# Altium PCB flatsat_2_PCB.PcbDoc (part 3 of 6)
Units mil, origin at the board's own origin, x right, y up, seen from the top; angles counter-clockwise.
Board outline 15748.03 x 9842.52 mil, 4 copper layers (Top Layer, FlatSat GND, FlatSat VCC, Bottom Layer), stack 82.765 mil thick; 155 components, 191 nets, 1391 pads, 1634 vias.
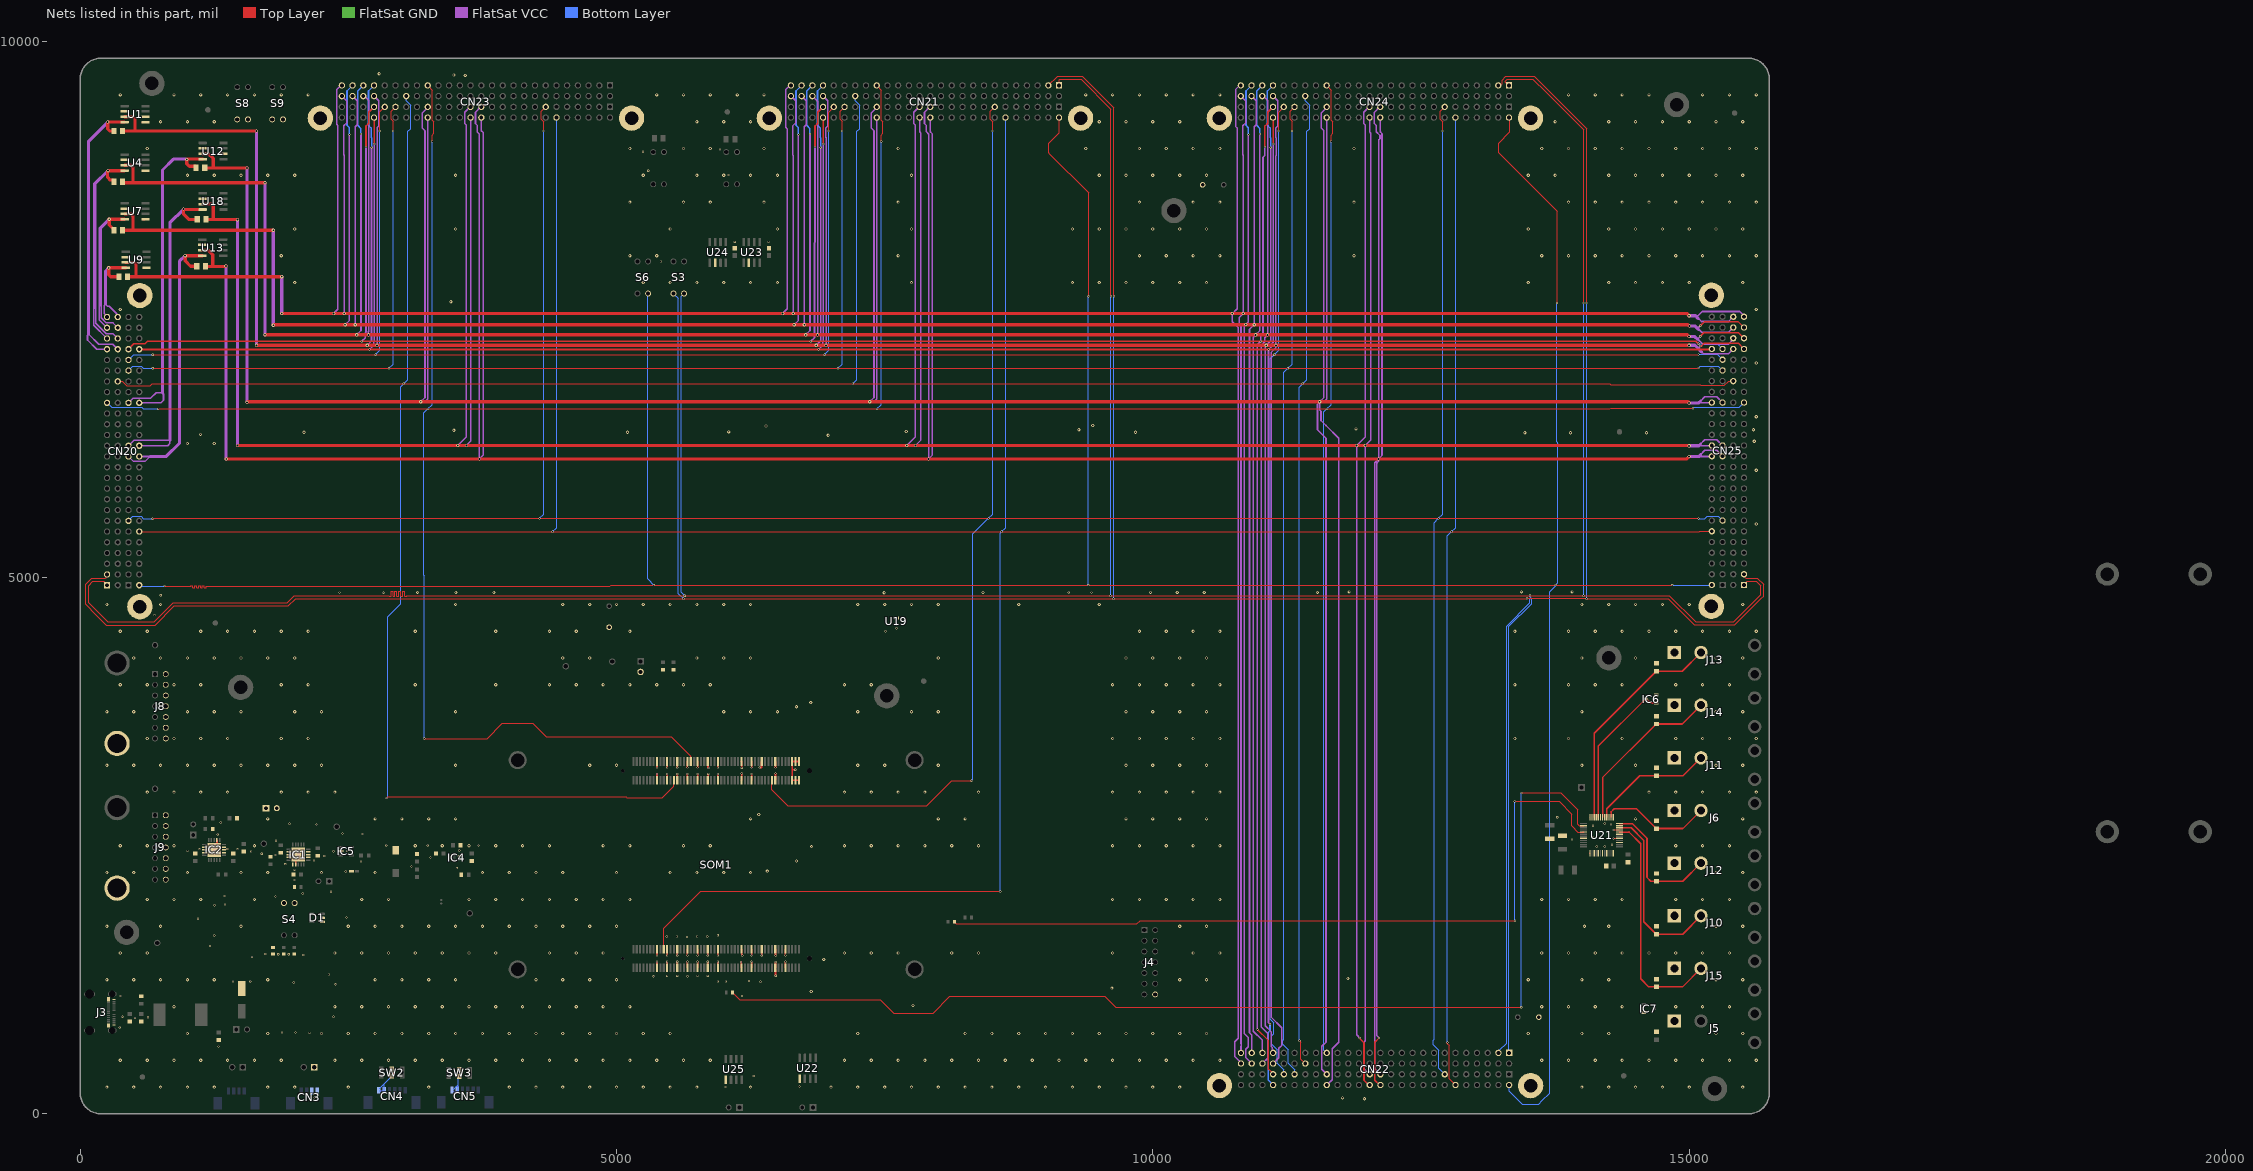
[diagram p4: the nets of this part, all layers, seen from the top]

## Via types
v1: diameter 20, hole 11.81, Top Layer to Bottom Layer, tented both sides, 872 vias
v2: diameter 30, hole 15, Top Layer to Bottom Layer, 690 vias
v3: diameter 30, hole 17.72, Top Layer to Bottom Layer, tented both sides, 72 vias

## Nets (pads, with @x,y where several pads share a name; then routed paths per layer and width w, separated by ;. In a path a pad name is that pad's centre, name@x,y a point inside that pad or via, vN(x,y) a via of type N, cw(c..) or ccw(c..) an arc to the next point about the centre after c; other vN are vias at no path point) (continued)
CH5: C28.2 J15.2 U21.20 | length 2167.5
  Top Layer w11.81: U21.20@14350.39,2627.95 14438.98,2627.95
  Top Layer w15: 14438.98,2627.95 14547.24,2519.68 14547.24,1259.84 14623.03,1184.06 C28.2@14694.88,1184.06 14937.39,1184.06 J15.2@15110.24,1356.9
CH7: C19.2 J10.2 U21.22 | length 1685.4
  Top Layer w11.81: U21.22@14350.39,2667.32 14458.66,2667.32
  Top Layer w15: 14458.66,2667.32 14576.77,2549.21 14576.77,1791.34 14691.93,1676.18 C19.2@14694.88,1676.18 14938.8,1676.18 J10.2@15110.24,1847.62
CH9: C24.2 J12.2 U21.24 | length 1266.6
  Top Layer w11.81: U21.24@14350.39,2706.69 14468.5,2706.69
  Top Layer w15: 14468.5,2706.69 14606.3,2568.9 14606.3,2204.72 14642.72,2168.31 C24.2@14694.88,2168.31 14940.21,2168.31 J12.2@15110.24,2338.34
CH11: C26.2 J6.2 U21.26 | length 1046.1
  Top Layer w13.54: U21.26@14271.65,2765.75 14271.65,2814.96
  Top Layer w15: 14271.65,2814.96 14301.18,2844.49 14337.45,2844.49 14507.87,2844.49 14691.93,2660.43 C26.2@14694.88,2660.43 14941.61,2660.43 J6.2@15110.24,2829.06
CH13: C22.2 J11.2 U21.28 | length 1153.6
  Top Layer w13.54: U21.28@14232.28,2765.75 14232.28,2844.49
  Top Layer w15: 14232.28,2844.49 14540.35,3152.56 C22.2@14694.88,3152.56 14943.02,3152.56 J11.2@15110.24,3319.77
CH15: C21.2 J14.2 U21.30 | length 1566.9
  Top Layer w13.54: U21.30@14192.91,2765.75 14192.91,2803.98
  Top Layer w15: 14192.91,2803.98 14192.91,3135.83 14691.93,3634.84 C21.2@14694.88,3634.84 14934.58,3634.84 J14.2@15110.24,3810.49
CH17: IC6.1 IC6.3 U21.32 | length 1394.2
  Top Layer w13.54: U21.32@14153.54,2765.75 14153.54,2803.98
  Top Layer w15: 14153.54,2803.98 14153.54,3429.13 14592.52,3868.11 IC6.3@14598.43,3868.11 ; IC6.3@14604.33,3868.11 14641.73,3830.71 IC6.1@14692.91,3830.71
CH19: C23.2 J13.2 U21.34 | length 2091
  Top Layer w13.54: U21.34@14114.17,2765.75 14114.17,2803.98
  Top Layer w15: 14114.17,2803.98 14114.17,3549.21 14691.93,4126.97 C23.2@14694.88,4126.97 14935.99,4126.97 J13.2@15110.24,4301.21
CLK_CHN_1: CN20.35 CN21.35 CN22.35 CN23.35 CN24.35 CN25.35 SOM1.JX1-35 | length 36325.5
  Top Layer w8: v1(727.5,6572.98) v1(3242.51,6572.98) v1(7428.34,6572.98) v1(11622.83,6572.98) 14261.27,6572.98 14269.06,6580.77 15033.02,6580.77 v1(15034.91,6578.88) ; v1(3208.66,3500) 3209.45,3499.21 3795.56,3499.21 3937.24,3640.89 4221.03,3640.89 4345.92,3516 5509.84,3516 5692.91,3332.93 SOM1.JX1-35@5692.91,3285.43 ; CN23.35@3240.16,9588.19 3283.07,9545.28 3283.07,9264.54 3296.31,9251.3 3296.31,9140.04 3281.88,9125.61 v1(3281.88,9066.03) ; CN21.35@7425.98,9588.19 7468.9,9545.28 7468.9,9264.54 7482.14,9251.3 7482.14,9140.04 7467.71,9125.61 v1(7467.71,9066.03) ; CN24.35@11620.47,9588.19 11663.39,9545.28 11663.39,9264.54 11676.63,9251.3 11676.63,9140.04 11662.2,9125.61 v1(11662.2,9066.03)
  Bottom Layer w8: CN20.35@251.18,6629.13 294.09,6586.22 574.83,6586.22 588.07,6572.98 v1(727.5,6572.98) ; v1(3208.66,3500) 3208.66,5017.25 3204.72,5021.19 3204.72,6535.19 v1(3242.51,6572.98) 3281.88,6612.35 v1(3281.88,9066.03) ; v1(7428.34,6572.98) 7467.71,6612.35 v1(7467.71,9066.03) ; CN22.35@11621.59,569.42 11621.59,569.59 11595.62,595.56 11595.62,6545.77 v1(11622.83,6572.98) 11662.2,6612.35 v1(11662.2,9066.03) ; v1(15034.91,6578.88) 15038.16,6578.88 15046.11,6586.84 15466.77,6586.84 CN25.35@15511.23,6631.3
CLK_CHN_2: CN20.64 CN21.64 CN22.64 CN23.64 CN24.64 CN25.64 SOM1.JX2-19 | length 38327.8
  Top Layer w8: CN20.64@551.18,5429.13 553.47,5426.84 v1(4403.08,5426.84) v1(8588.9,5426.84) 8588.98,5426.76 12783.31,5426.76 v1(12783.39,5426.68) ; SOM1.JX2-19@5440.94,1535.43 5440.94,1730.32 5784.74,2074.11 v1(8577.42,2074.11) ; v1(12747.11,665.18) 12744.82,662.88 12744.82,656.25 12744.4,655.84 12762.12,638.12 12762.12,328.88 CN22.64@12821.59,269.42 ; v1@12783.39,5426.84 15092.86,5426.84 15097.61,5431.59 15210.93,5431.59 CN25.64@15211.23,5431.3
  Bottom Layer w8: v1(4403.08,5426.84) 4442.45,5466.21 CN23.64@4442.45,9285.9 ; v1(8577.42,2074.11) 8577.42,5412.11 8588.9,5423.6 v1(8588.9,5426.84) 8628.27,5466.21 CN21.64@8628.27,9285.9 ; v1(12747.11,665.18) 12744.95,667.34 12744.95,5388.4 12783.23,5426.68 v1(12783.39,5426.68) ; v1@12783.39,5426.84 12822.76,5466.21 CN24.64@12822.76,9285.9
CLK_CHN_3: R7.1 U21.38 | length 10322.3
  Top Layer w7.99: 9655.51,994.09 v1(13435.04,994.09) ; v1(13437.01,2992.13) 13803.15,2992.13 13960.63,2834.65 13960.63,2700.79 13974.41,2687.01 U21.38@14015.75,2687.01
  Top Layer w8: R7.1@6082.68,1131.89 6148.96,1065.61 7457.48,1065.61 7584.08,939.02 7951.41,939.02 8108.89,1096.5 9553.11,1096.5 9655.51,994.09
  Bottom Layer w7.99: v1(13435.04,994.09) 13436.02,995.08 13436.02,2991.14 v1(13437.01,2992.13)
COMMON_KILL_SWITCH_1: CN4.5 CN4.6 SW2.2 | length 311.5
  FlatSat GND w10.98: SW2.2@2903.54,351.27 SW2.2@2903.54,385.72
  Bottom Layer w10.98: CN4.6@2785.43,216.54 2828.21,216.54 2834.65,222.97 2834.65,282.37 ; CN4.6@2785.43,236.22 2788.5,236.22 2834.65,282.37 ; SW2.2@2903.54,351.27 2834.65,282.37
COMMON_KILL_SWITCH_2: CN5.5 CN5.6 SW3.2 | length 241.3
  Bottom Layer w10.98: CN5.6@3474.41,204.84 CN5.5@3517.19,204.84 ; CN5.6@3477.47,224.52 3523.62,270.67 ; CN5.5@3523.62,211.27 3523.62,270.67 ; SW3.2@3523.62,344.49 3523.62,270.67
CS_CHN_1: CN20.40 CN21.40 CN22.40 CN23.40 CN24.40 CN25.40 SOM1.JX1-26 | length 36371.7
  Top Layer w8: CN20.40@351.18,6829.13 393.86,6829.13 434.39,6788.6 653.68,6788.6 672.96,6807.87 v1(3017.46,6807.87) v1(7203.29,6807.87) v1(11397.78,6807.87) 14259.15,6807.87 14271.08,6795.94 15103.54,6795.94 15108.72,6790.76 15328.02,6790.76 15368.55,6831.3 CN25.40@15411.23,6831.3 ; v1(2855.02,2945.16) 2856.2,2945.16 2865.71,2954.67 5088.88,2954.67 5095.89,2947.66 5427.97,2947.66 5535.43,3055.12 SOM1.JX1-26@5535.43,3112.2 ; v1(11367.91,682.41) 11381.05,669.27 11381.05,549.03 11381.1,548.98 11381.1,511.81 11421.59,471.33 CN22.40@11421.59,469.42
  Bottom Layer w8: v1(2855.02,2945.16) 2866.14,2956.28 2866.14,4633.86 2989.28,4756.99 2989.28,6779.69 v1(3017.46,6807.87) 3055.17,6845.58 3055.17,9160.16 3080.69,9185.69 3080.69,9404.98 3040.16,9445.51 CN23.40@3040.16,9488.19 ; v1(7203.29,6807.87) 7240.99,6845.58 7240.99,9160.16 7266.52,9185.69 7266.52,9404.98 7225.98,9445.51 CN21.40@7225.98,9488.19 ; v1(11367.91,682.41) 11365.62,684.7 11365.62,691.19 11363.72,693.09 11363.72,1417.28 11363.67,1417.32 11363.67,6773.76 v1@11396.11,6806.21 ; v1(11397.78,6807.87) 11435.48,6845.58 11435.48,9160.16 11461.01,9185.69 11461.01,9404.98 11420.47,9445.51 CN24.40@11420.47,9488.19
CS_CHN_2: CN20.65 CN21.65 CN22.65 CN23.65 CN24.65 CN25.65 SOM1.JX1-84 | length 36419.1
  Top Layer w8: v1(675.84,5548.21) 678.14,5550.51 685.85,5550.51 686.53,5551.18 v1(4281.71,5551.18) v1(8467.54,5551.18) v1(12662.02,5551.18) 15085.76,5551.18 v1(15086.57,5550.37) v1@15085.79,5549.6 ; v1(4321.08,9163.53) 4321.08,9248.81 4298.82,9271.07 4298.82,9346.85 CN23.65@4340.16,9388.19 ; SOM1.JX1-84@6448.82,3112.2 6448.82,3023.62 6598.43,2874.02 7892.16,2874.02 8124.44,3106.3 v1(8311.02,3106.3) ; v1(8506.91,9163.53) 8506.91,9248.81 8484.65,9271.07 8484.65,9346.85 CN21.65@8525.98,9388.19 ; v1(12701.39,9163.53) 12701.39,9248.81 12679.13,9271.07 12679.13,9346.85 CN24.65@12720.47,9388.19
  Bottom Layer w8: CN20.65@451.18,5529.13 492.52,5570.47 568.3,5570.47 590.56,5548.21 v1(675.84,5548.21) ; v1(4281.71,5551.18) 4321.08,5590.55 v1(4321.08,9163.53) ; v1(8311.02,3106.3) 8311.02,3109.11 8322.83,3120.92 8322.83,5406.48 v1(8467.54,5551.18) 8506.91,5590.55 v1(8506.91,9163.53) ; v1(12701.39,9163.53) 12701.39,5590.55 v1(12662.02,5551.18) 12622.65,5511.81 12622.65,1417.32 12622.65,694.8 12613.43,685.58 12613.43,646.97 12667.32,593.08 12667.32,423.68 CN22.65@12721.59,369.42 ; v1(15086.57,5550.37) 15146.83,5550.37 15168.29,5571.83 15228.02,5571.83 15228.98,5570.87 15271.66,5570.87 CN25.65@15311.23,5531.3
CS_CHN_3: R13.2 U21.41 | length 7187.7
  Top Layer w7.99: 9881.89,1801.18 v1(13375.98,1801.18) ; v1(13374.02,2913.39) 13787.4,2913.39 13905.51,2795.28 13905.51,2685.04 13962.6,2627.95 14011.93,2627.95 14013.84,2629.86 U21.41@14015.75,2627.95
  Top Layer w8: R13.2@8150.08,1791.34 8150.08,1787.4 8165.83,1771.65 8188.98,1771.65 9852.36,1771.65 9881.89,1801.18
  Bottom Layer w7.99: v1(13374.02,2913.39) 13375,2912.4 13375,1802.17 v1(13375.98,1801.18)
EPS_H1-45: CN20.45 CN20.46 R25.1 U1.8 | length 2944.1
  Top Layer w30: R25.1@314.33,9163.39 275.59,9163.39 257.09,9181.89 v3(257.09,9245.87) U1.8@414.57,9245.87
  FlatSat VCC w15: CN20.45@251.18,7129.13 154.33,7129.13 68.9,7214.57 68.9,7260.16 78.74,7270 173.54,7175.2 305.12,7175.2 CN20.46@351.18,7129.13
  FlatSat VCC w30: 78.74,7270 78.74,9067.52 v3(257.09,9245.87)
EPS_H1-47: CN20.47 CN20.48 R27.1 U4.8 | length 2401.2
  Top Layer w30: R27.1@314.33,8690.94 314.33,8697.32 305.71,8705.94 280.87,8705.94 255.91,8730.91 255.91,8789.37 v3(259.65,8793.11) U4.8@414.57,8793.11
  FlatSat VCC w15: CN20.47@251.18,7229.13 127.95,7352.36 127.95,7510.76 136.92,7519.72 146.12,7528.93 146.12,7371.92 243.81,7274.23 306.09,7274.23 CN20.48@351.18,7229.13
  FlatSat VCC w30: 136.92,7519.72 136.92,8670.38 v3(259.65,8793.11)
EPS_H1-49: CN20.49 CN20.50 R26.1 U7.8 | length 1659.7
  Top Layer w30: R26.1@314.33,8238.19 314.33,8244.57 271.85,8287.05 v3(271.85,8340.35) U7.8@414.57,8340.35
  FlatSat VCC w15: CN20.49@251.18,7329.13 178.13,7402.19 178.13,7532.08 187.81,7541.76 196.76,7532.81 196.63,7532.69 196.63,7421.41 243.81,7374.23 306.09,7374.23 CN20.50@351.18,7329.13
  FlatSat VCC w30: 187.81,7541.76 187.81,8256.32 v3(271.85,8340.35)
EPS_H1-51: CN20.51 CN20.52 R28.1 U9.8 | length 988.6
  Top Layer w30: R28.1@363.54,7805.12 285.43,7805.12 266.93,7823.62 v3(266.93,7887.6) U9.8@424.41,7887.6
  FlatSat VCC w15: CN20.51@251.18,7429.13 251.18,7435.15 226.38,7459.95 226.38,7539.37 236.22,7549.21 255.91,7529.53 272.31,7529.53 342.75,7459.09 342.75,7437.56 CN20.52@351.18,7429.13
  FlatSat VCC w30: 236.22,7549.21 236.22,7856.89 v3(266.93,7887.6)
EPS_H2-25: CN20.77 CN20.78 R30.1 U13.8 | length 2765.1
  Top Layer w30: R30.1@1078.84,7902.04 1029.04,7902.04 979.11,7951.97 v3(979.11,8001.18) U13.8@1138.48,8001.18
  FlatSat VCC w15: CN20.77@451.18,6129.13 497.64,6082.68 604.74,6082.68 651.2,6129.13 CN20.78@551.18,6129.13
  FlatSat VCC w30: 651.2,6129.13 804.33,6129.13 925.2,6250 925.2,7947.27 v3(979.11,8001.18)
EPS_H2-27: CN20.79 CN20.80 R31.1 U18.8 | length 3313.9
  Top Layer w30: R31.1@1092.52,8338.98 R31.1@1091.89,8338.98 1013.15,8338.98 964.57,8387.56 v3(964.57,8435.04) 968.31,8431.3 U18.8@1142.91,8431.3
  FlatSat VCC w15: CN20.79@451.18,6229.13 501.57,6279.53 836.61,6279.53 836.61,6250 815.75,6229.13 CN20.80@551.18,6229.13
  FlatSat VCC w30: 836.61,6279.53 836.61,8307.09 v3(964.57,8435.04)
EPS_H2-35: CN20.87 CN20.88 R29.1 U12.8 | length 3310
  Top Layer w30: R29.1@1082.05,8818.9 1082.05,8825.28 1073.43,8833.9 1018.46,8833.9 994.09,8858.27 v3(994.09,8897.64) 997.83,8901.38 U12.8@1142.91,8901.38
  FlatSat VCC w15: CN20.87@451.18,6629.13 495.28,6673.23 659.45,6673.23 708.66,6722.44 767.72,6722.44 768.77,6722.44 777.56,6713.65 777.56,6653.54 753.15,6629.13 CN20.88@551.18,6629.13
  FlatSat VCC w30: 767.72,6722.44 767.72,8799.21 869.88,8901.38 990.35,8901.38 v3(994.09,8897.64)
FB_VCCIO: D1.1 IC1.16 R1.2 R4.1 S4.1 S4.2 | length 23.8
  Top Layer w15: R4.1@1789,1555.96 1795.28,1549.68 R4.1@1799.21,1549.68 ; S4.2@1899.61,1959.53 S4.2@1899.61,1970.47
GND: C1.2 C2.2 C3.2 C4.2 C5.2 C6.2 C7.2 C8.2 C9.2 C11.1 C12.2 C13.2 C14.2 C15.2 C17.2 C18.2 C19.1 C20.2 C21.1 C22.1 C23.1 C24.1 C25.1 C26.1 C27.2 C28.1 C29.2 C30.2 C52.2 C53.2 C54.2 C55.1 CN2.0 CN3.1 CN3.2 CN10.1 CN10.2 CN13.0 CN15.1 CN16.2 CN20.0 CN21.0 CN22.0 CN23.0 CN24.0 CN25.0 D1.2 IC1.2 IC1.3 IC1.4 IC1.12 IC1.13 IC1.14 IC1.17 IC1.21 IC2.2 IC2.3 IC2.4 IC2.12 IC2.13 IC2.14 IC2.17 IC2.21 IC4.3 IC5.2 IC6.2 IC7.2 J3.A1 J3.A12 J3.B1 J3.B12 J4.14 J5.1 J6.1 J8.2 J8.4 J8.6 J8.8 J8.10 J8.12 J8.14 J9.2 J9.4 J9.6 J9.8 J9.10 J9.12 J9.14 J10.1 J11.1 J12.1 J13.1 J14.1 J15.1 L2.1 L3.1 L4.1 LED1.1 R2.2 R3.2 R4.2 R6.2 R10.2 R11.2 S8.1 S8.2 S9.1 S9.2 SOM1.JX1-15 SOM1.JX1-16 SOM1.JX1-21 SOM1.JX1-22 SOM1.JX1-27 SOM1.JX1-28 SOM1.JX1-33 SOM1.JX1-34 SOM1.JX1-39 SOM1.JX1-40 SOM1.JX1-45 SOM1.JX1-46 SOM1.JX1-51 SOM1.JX1-52 SOM1.JX1-65 SOM1.JX1-66 SOM1.JX1-71 SOM1.JX1-72 SOM1.JX1-77 SOM1.JX1-85 SOM1.JX1-86 SOM1.JX1-95 SOM1.JX1-96 SOM1.JX1-97 SOM1.JX1-98 SOM1.JX1-99 SOM1.JX1-100 SOM1.JX2-15 SOM1.JX2-16 SOM1.JX2-21 SOM1.JX2-22 SOM1.JX2-27 SOM1.JX2-28 SOM1.JX2-33 SOM1.JX2-34 SOM1.JX2-39 SOM1.JX2-40 SOM1.JX2-45 SOM1.JX2-46 SOM1.JX2-51 SOM1.JX2-52 SOM1.JX2-65 SOM1.JX2-66 SOM1.JX2-71 SOM1.JX2-72 SOM1.JX2-77 SOM1.JX2-85 SOM1.JX2-86 SOM1.JX2-91 SOM1.JX2-92 SW1.2 U1.1 U1.2 U1.6 U4.1 U4.6 U7.1 U7.6 U9.1 U9.6 U12.2 U12.6 U13.6 U18.6 U19.2 U19.4 U21.1 U21.3 U21.5 U21.7 U21.9 U21.12 U21.15 U21.17 U21.19 U21.21 U21.23 U21.25 U21.27 U21.29 U21.31 U21.33 U21.35 U21.36 U21.44 U22.5 U23.2 U24.2 U25.5 | length 3723.3
  Top Layer w8: U7.6@401.25,8437.34 U7.6@403.54,8435.04 ; U1.6@413.24,9344.54 U1.6@414.57,9345.87 ; U1.1@576.18,9245.87 U1.1@609.06,9245.87 ; U1.2@576.18,9295.87 U1.2@609.06,9295.87 ; U4.1@577.36,8789.37 U4.1@610.24,8789.37 ; U7.1@585.83,8336.61 U7.1@600.39,8336.61 ; U9.1@586.02,7887.6 U9.1@618.9,7887.6 ; U13.6@1105.61,8101.18 U13.6@1138.48,8101.18 ; U18.6@1110.04,8531.3 U18.6@1142.91,8531.3 ; U12.6@1110.04,9001.38 U12.6@1142.91,9001.38 ; U12.2@1304.53,8951.38 U12.2@1337.4,8951.38 ; U21.36@14073.28,2767.27 U21.36@14074.8,2765.75 ; U21.1@14074.8,2431.1 U21.1@14076.69,2432.99 ; v1(14292.9,2568.9) U21.17@14350.39,2568.9 ; v1(14292.9,2647.64) U21.21@14350.39,2647.64
  Top Layer w15: IC2.21@1224.41,2435.04 IC2.21@1250,2460.63 ; IC2.21@1224.41,2486.22 IC2.21@1250,2460.63 ; IC2.21@1275.59,2435.04 IC2.21@1250,2460.63 ; IC2.17@1275.59,2553.15 1275.59,2486.22 IC2.21@1250,2460.63 ; IC1.17@2008.86,2325.79 IC1.21@2008.86,2392.72 ; IC1.21@2008.86,2443.9 IC1.21@2034.45,2418.31 ; IC1.21@2060.04,2392.72 IC1.21@2034.45,2418.31 ; IC1.21@2060.04,2443.9 IC1.21@2034.45,2418.31 ; SOM1.JX2-16@5377.95,1362.2 v1(5377.95,1419.19) ; v1(5377.95,1478.45) SOM1.JX2-15@5377.95,1535.43 ; SOM1.JX1-16@5377.95,3112.2 v1(5377.95,3169.19) ; v1(5377.95,3228.45) SOM1.JX1-15@5377.95,3285.43 ; SOM1.JX2-22@5472.44,1362.2 v1(5472.44,1419.19) ; v1(5472.44,1478.45) SOM1.JX2-21@5472.44,1535.43 ; SOM1.JX1-22@5472.44,3112.2 v1(5472.44,3169.19) ; v1(5472.44,3228.45) SOM1.JX1-21@5472.44,3285.43 ; SOM1.JX2-28@5566.93,1362.2 v1(5566.93,1419.19) ; v1(5566.93,1478.45) SOM1.JX2-27@5566.93,1535.43 ; SOM1.JX1-28@5566.93,3112.2 v1(5566.93,3169.19) ; v1(5566.93,3228.45) SOM1.JX1-27@5566.93,3285.43 ; SOM1.JX2-34@5661.42,1362.2 v1(5661.42,1419.19) ; v1(5661.42,1478.45) SOM1.JX2-33@5661.42,1535.43 ; SOM1.JX1-34@5661.42,3112.2 v1(5661.42,3169.19) ; v1(5661.42,3228.45) SOM1.JX1-33@5661.42,3285.43 ; SOM1.JX2-40@5755.9,1362.2 v1(5755.9,1419.19) ; v1(5755.91,1478.45) SOM1.JX2-39@5755.91,1535.43 ; SOM1.JX1-40@5755.9,3112.2 v1(5755.9,3169.19) ; v1(5755.9,3228.45) SOM1.JX1-39@5755.91,3285.43 ; SOM1.JX2-46@5850.39,1362.2 5850.96,1362.77 5850.96,1418.63 v1(5851.52,1419.19) ; SOM1.JX2-45@5850.39,1535.43 5850.96,1534.87 5850.96,1479.01 v1(5851.52,1478.45) ; SOM1.JX1-46@5850.39,3112.2 5856.19,3118.01 v1(5856.19,3170.6) ; SOM1.JX1-45@5850.39,3285.43 5852.89,3282.93 5852.89,3229.78 5857.47,3225.21 v1(5857.47,3223.85) ; SOM1.JX2-52@5944.88,1362.2 v1(5944.88,1419.19) ; v1(5944.88,1478.45) SOM1.JX2-51@5944.88,1535.43 ; SOM1.JX1-52@5944.88,3112.2 v1(5944.88,3169.19) ; v1(5944.88,3228.45) SOM1.JX1-51@5944.88,3285.43 ; v1(6161.42,1417.32) 6161.42,1415.97 6162.85,1414.53 6162.85,1364.7 SOM1.JX2-66@6165.35,1362.2 ; SOM1.JX2-65@6165.35,1535.43 6167.44,1533.35 6167.44,1483.52 6171.97,1478.99 v1(6171.97,1477.63) ; SOM1.JX1-66@6165.35,3112.2 6167.93,3114.78 v1(6167.93,3173.49) ; SOM1.JX1-65@6165.35,3285.43 6167.41,3283.37 v1(6167.41,3226.41) ; SOM1.JX2-72@6259.84,1362.2 v1(6259.84,1419.19) ; v1(6259.84,1478.45) SOM1.JX2-71@6259.84,1535.43 ; SOM1.JX1-72@6259.84,3112.2 v1(6259.84,3169.19) ; v1(6259.84,3228.45) SOM1.JX1-71@6259.84,3285.43 ; v1(6335.76,3228.45) 6335.96,3228.65 6351.83,3228.65 6351.83,3282.93 SOM1.JX1-77@6354.33,3285.43 ; v1(6354.33,1478.45) SOM1.JX2-77@6354.33,1535.43 ; SOM1.JX2-86@6480.31,1362.2 6482.81,1364.7 6482.81,1413.88 6484.9,1415.97 v1(6484.9,1417.32) ; SOM1.JX2-85@6480.31,1535.43 6482.81,1532.93 6482.81,1479.82 6484.9,1477.73 v1(6484.9,1476.38) ; SOM1.JX1-85@6480.31,3285.43 6482.44,3283.31 6482.44,3229.3 v1(6483.4,3228.35) ; v1@6482.16,1287.58 SOM1.JX2-86@6482.16,1343.01 ; SOM1.JX1-86@6482.81,3114.7 6482.44,3115.08 6482.44,3172.42 v1(6483.4,3173.37) ; SOM1.JX2-92@6574.8,1362.2 v1(6574.8,1419.19) ; v1(6574.8,1478.45) SOM1.JX2-91@6574.8,1535.43 ; 6637.79,3203.37 SOM1.JX1-96@6637.79,3112.2 SOM1.JX1-98@6669.29,3112.2 SOM1.JX1-100@6700.78,3112.2 ; v1(6666.21,3208.66) 6637.79,3208.66 SOM1.JX1-95@6637.8,3285.43 SOM1.JX1-97@6669.29,3285.43 SOM1.JX1-99@6700.79,3285.43
  other v1: 2185.04,153.54 6015.75,251.97 6704.72,255.91 6279.53,354.33 1289.37,629.92 2137.8,755.91 1881.89,759.84 2007.87,759.84 370.08,807.09 511.81,895.67 633.86,901.57 393.7,905.51 2362.2,905.51 377.95,1098.43 6169.29,1098.43 2381.89,1208.66 1992.13,1224.41 6342.52,1232.28 1425.2,1236.22 1586.61,1236.22 5944.88,1236.22 6019.69,1236.22 6236.22,1240.16 5346.46,1283.46 5661.42,1283.46 5472.44,1287.4 5566.93,1287.4 5755.91,1287.4 5850.39,1287.4 6485.04,1287.58 2318.9,1299.21 1602.36,1464.57 2080.71,1482.28 1846.46,1488.19 1944.88,1488.19 1726.38,1490.16 1210.63,1564.96 5657.48,1649.61 5468.5,1653.54 5562.99,1653.54 5751.97,1653.54 5846.46,1653.54 1250,1663.39 5944.88,1665.35 1098.43,1818.9 2484.25,1830.71 1251.97,1944.88 1350.98,1952.56 1822.83,2027.56 1346.46,2031.5 2074.8,2055.12 2338.58,2070.87 2000,2181.1 2476.38,2259.84 2000,2275.59 3511.81,2291.34 3090.55,2307.09 1912.4,2328.56 2618.11,2354.33 2181.1,2362.2 3267.72,2389.76 2275.59,2405.51 1822.83,2413.39 1692.91,2425.2 1594.49,2444.88 2362.2,2448.82 1000,2452.76 2488.19,2452.76 3533.79,2456.26 1114.17,2468.5 1468.5,2468.5 1372.05,2470.67 14137.8,2492.13 14212.6,2492.13 2854.33,2503.94 3240.16,2503.94 3712.6,2503.94 14281.5,2509.84 1826.77,2547.24 13907.48,2559.06 14104.33,2578.74 1283.46,2606.3 2633.86,2610.24 2444.88,2614.17 14104.33,2687.01 2204.72,2696.85 14271.65,2696.85 1952.76,2704.72 14212.6,2706.69 1311.02,2716.54 13769.68,2765.75 7507.87,4500 7610.24,4527.56 692.91,4649.61 751.97,4834.65 2826.77,4858.27 2417.32,4862.2 9216.54,4862.2 9429.13,4862.2 5413.72,7945.79 6102.36,8129.92 6417.32,8129.92 6043.64,8752.88 5295.61,8792.25 5246.4,8969.41 5964.9,8989.1
  other v2: 11972.44,141.73 11767.72,149.61 250,250 500,250 750,250 1000,250 1250,250 1750,250 2000,250 2500,250 3250,250 4000,250 4250,250 4500,250 4750,250 5000,250 5250,250 5500,250 5750,250 6250,250 7000,250 7250,250 7500,250 7750,250 8000,250 8250,250 8500,250 8750,250 9000,250 9250,250 9500,250 9750,250 10000,250 10250,250 14000,250 14250,250 14500,250 14750,250 15000,250 15500,250 375,500 625,500 875,500 1125,500 1375,500 1625,500 1875,500 2375,500 2625,500 2875,500 3125,500 3375,500 3625,500 3875,500 4125,500 4375,500 4625,500 4875,500 5125,500 5375,500 5625,500 5875,500 7125,500 7375,500 7625,500 7875,500 8125,500 8375,500 8625,500 8875,500 9125,500 9375,500 9625,500 9875,500 10125,500 10375,500 10625,500 13625,500 13875,500 14125,500 14375,500 14625,500 14875,500 15125,500 15375,500 15625,500 1000,750 1750,750 2250,750 2500,750 2750,750 3000,750 3250,750 3500,750 3750,750 4000,750 4250,750 4500,750 4750,750 5000,750 5250,750 5500,750 7250,750 8250,750 8500,750 8750,750 9000,750 9250,750 9500,750 9750,750 10000,750 10250,750 10500,750 13500,750 14000,750 14250,750 15250,750 15500,750 875,1000 2375,1000 2625,1000 2875,1000 3125,1000 3375,1000 3625,1000 3875,1000 4125,1000 4375,1000 4625,1000 4875,1000 5125,1000 13625,1000 13875,1000 14125,1000 14375,1000 14875,1000 15125,1000 15375,1000 7763.78,1011.81 6814.96,1141.73 9618.11,1173.23 250,1250 500,1250 750,1250 1000,1250 1250,1250 1750,1250 2750,1250 3000,1250 3250,1250 3500,1250 4250,1250 4500,1250 4750,1250 5000,1250 10250,1250 10500,1250 13500,1250 14000,1250 14250,1250 15250,1250 15500,1250 11818.9,1263.78 6933.07,1440.94 375,1500 625,1500 2375,1500 2625,1500 2875,1500 3125,1500 3375,1500 3625,1500 3875,1500 4375,1500 4625,1500 4875,1500 7125,1500 7375,1500 7625,1500 8125,1500 8375,1500 9625,1500 10375,1500 10625,1500 13625,1500 13875,1500 14125,1500 14375,1500 14625,1500 14875,1500 15125,1500 15375,1500 250,1750 750,1750 1500,1750 2500,1750 2750,1750 3000,1750 3250,1750 3500,1750 3750,1750 4000,1750 4250,1750 4500,1750 4750,1750 5000,1750 10250,1750 10500,1750 14023.57,1750 14250,1750 15250,1750 15500,1750 625,2000 875,2000 1125,2000 1625,2000 2625,2000 2875,2000 3625,2000 3875,2000 4125,2000 4375,2000 4625,2000 4875,2000 5125,2000 9625,2000 9875,2000 10125,2000 10375,2000 10625,2000 13625,2000 13875,2000 14125,2000 14375,2000 14875,2000 15125,2000 15375,2000 250,2250 500,2250 1000,2250 1500,2250 1750,2250 2250,2250 2750,2250 3750,2250 4000,2250 4250,2250 4500,2250 5000,2250 5500,2250 5750,2250 6000,2250 6250,2250 15250,2250 15500,2250 6405.51,2263.78 6677.17,2358.27 6818.9,2492.13 375,2500 625,2500 875,2500 1625,2500 3125,2500 3375,2500 3625,2500 3875,2500 4125,2500 4375,2500 4875,2500 5125,2500 5625,2500 5875,2500 7125,2500 7375,2500 7625,2500 7875,2500 8125,2500 8375,2500 9625,2500 9875,2500 10125,2500 10375,2500 10625,2500 14875,2500 15125,2500 15375,2500 1750,2750 2750,2750 3000,2750 3250,2750 3500,2750 6250,2750 8000,2750 8250,2750 9750,2750 10000,2750 10250,2750 10500,2750 14500,2750 15250,2750 15500,2750 6326.77,2791.34 625,3000 875,3000 1125,3000 1375,3000 1875,3000 2125,3000 2375,3000 7125,3000 7375,3000 7625,3000 7875,3000 8375,3000 9625,3000 9875,3000 10125,3000 10375,3000 10625,3000 14625,3000 14875,3000 15125,3000 15375,3000 15625,3000 250,3250 500,3250 750,3250 1000,3250 1250,3250 1500,3250 1750,3250 2000,3250 2250,3250 3500,3250 4750,3250 5000,3250 7250,3250 7500,3250 8000,3250 9750,3250 10000,3250 10250,3250 10500,3250 14000,3250 14500,3250 15250,3250 15500,3250 625,3500 875,3500 1125,3500 1375,3500 1875,3500 2125,3500 9625,3500 9875,3500 10125,3500 10375,3500 10625,3500 13375,3500 13875,3500 14375,3500 14875,3500 15125,3500 15375,3500 15625,3500 250,3750 500,3750 1000,3750 1250,3750 1500,3750 2000,3750 2250,3750 3500,3750 6000,3750 6250,3750 6500,3750 7250,3750 7750,3750 8000,3750 9750,3750 10000,3750 10250,3750 10500,3750 14000,3750 15250,3750 15500,3750 6677.17,3795.28 6811.02,3834.65 375,4000 625,4000 875,4000 1125,4000 1875,4000 2125,4000 3125,4000 3875,4000 4375,4000 4625,4000 4875,4000 5125,4000 5375,4000 5625,4000 5875,4000 7125,4000 7375,4000 9625,4000 9875,4000 10125,4000 10375,4000 10625,4000 13375,4000 13875,4000 14125,4000 14375,4000 14875,4000 15125,4000 15375,4000 500,4250 750,4250 1000,4250 1250,4250 1500,4250 1750,4250 2000,4250 4500,4250 4750,4250 5750,4250 6000,4250 6250,4250 8000,4250 9750,4250 10000,4250 10250,4250 10500,4250 14000,4250 14500,4250 15250,4250 15500,4250 375,4500 625,4500 1125,4500 1375,4500 1625,4500 1875,4500 2125,4500 3125,4500 3875,4500 4375,4500 4625,4500 5125,4500 9875,4500 10125,4500 10375,4500 10625,4500 13375,4500 13875,4500 14125,4500 14375,4500 14625,4500 14875,4500 15125,4500 15375,4500 15625,4500 250,4750 750,4750 3500,4750 4500,4750 4750,4750 5000,4750 5250,4750 5500,4750 5750,4750 6000,4750 6250,4750 7250,4750 7500,4750 7750,4750 8000,4750 8750,4750 9500,4750 14000,4750 14250,4750 14500,4750 14750,4750 15000,4750 15500,4750 7495.08,4858.27 3145.94,4862.2 3502.95,4862.2 3857.28,4862.2 8416.34,4862.2 9978.35,4862.2 10228.35,4862.2 10478.35,4862.2 11534.45,4862.2 11829.72,4866.14 13436.02,4866.14 13908.46,4866.14 15625,5500 15625,6000 1000,6250 1250,6250 15606.3,6271.65 6972.44,6326.77 1122.05,6334.65 13468.5,6350.39 13893.7,6350.39 14602.36,6350.39 2086.61,6354.33 5102.36,6354.33 9838.58,6354.33 6047.24,6358.27 7700.79,6362.2 3484.25,6374.02 9311.02,6377.95 15598.43,6377.95 11893.7,6385.83 6393.7,6413.39 9440.94,6417.32 15625,6500 15625,7000 375,7500 15625,7500 3456.69,7570.87 2000,7750 5250,7750 5500,7750 5750,7750 6000,7750 6250,7750 6500,7750 7750,7750 9250,7750 9500,7750 9750,7750 10000,7750 10250,7750 10500,7750 13500,7750 14250,7750 14500,7750 14750,7750 15000,7750 15500,7750 1875,8000 5125,8000 5375,8000 7625,8000 9875,8000 10125,8000 10375,8000 10625,8000 11875,8000 13625,8000 13875,8000 14125,8000 14375,8000 14625,8000 14875,8000 15125,8000 15375,8000 15625,8000 2000,8250 3500,8250 5500,8250 6500,8250 7750,8250 9250,8250 9500,8250 9750,8250 10000,8250 10250,8250 10500,8250 13500,8250 14250,8250 14500,8250 14750,8250 15000,8250 15250,8250 15500,8250 5125,8500 5625,8500 5875,8500 6375,8500 7625,8500 9875,8500 10375,8500 10625,8500 11875,8500 13875,8500 14125,8500 14375,8500 14625,8500 14875,8500 15125,8500 15375,8500 15625,8500 1000,8750 1250,8750 1500,8750 1750,8750 2000,8750 3500,8750 5250,8750 5750,8750 6000,8750 6250,8750 6500,8750 7750,8750 9500,8750 9750,8750 10000,8750 10250,8750 10500,8750 13500,8750 13750,8750 14250,8750 14500,8750 14750,8750 15000,8750 15250,8750 15500,8750 625,9000 5125,9000 5625,9000 5875,9000 6375,9000 7625,9000 9375,9000 9875,9000 10125,9000 10375,9000 10625,9000 11875,9000 13625,9000 13875,9000 14125,9000 14375,9000 14625,9000 14875,9000 15125,9000 15375,9000 15625,9000 750,9250 1000,9250 1250,9250 5750,9250 6000,9250 6250,9250 9500,9250 9750,9250 10000,9250 10250,9250 13750,9250 14250,9250 14500,9250 14750,9250 15000,9250 15250,9250 15500,9250 375,9500 875,9500 1125,9500 1375,9500 1625,9500 1875,9500 2125,9500 5375,9500 5625,9500 5875,9500 6125,9500 6375,9500 9375,9500 9625,9500 9875,9500 10125,9500 10375,9500 10625,9500 13875,9500 14125,9500 14375,9500 14625,9500 15125,9500 15375,9500 15625,9500 3590.55,9681.1 3484.25,9685.04 2787.4,9696.85
H1-45: CN21.45 CN21.46 CN22.45 CN22.46 CN23.45 CN23.46 CN24.45 CN24.46 CN25.45 CN25.46 R25.2 U1.7 | length 45653.6
  Top Layer w15: v1(15103.27,7158.86) 15114.76,7158.86 15139.37,7183.46 15459.06,7183.46 CN25.45@15511.23,7131.3
  Top Layer w30: R25.2@394.33,9163.39 511.81,9163.39 ; U1.7@414.57,9295.87 494.24,9295.87 511.81,9278.29 511.81,9163.39 ; v3(1643.7,7165.35) v3(2766.93,7165.35) v3(6862.41,7165.35) v3(6952.75,7165.35) v3(11056.9,7165.35) v3(11147.24,7165.35) v3(15000,7165.35) ; v3(1643.7,9163.39) 511.81,9163.39
  FlatSat VCC w15: v3(2676.59,7165.35) 2715.96,7204.72 2715.96,7248.12 2718.83,7250.99 2718.83,7275.43 2715.96,7278.3 2715.96,9006.25 2718.83,9009.12 v1(2718.83,9010.47) ; CN23.46@2740.16,9488.19 2784.19,9444.15 2784.19,9339.49 2784.19,9209.52 2768.43,9193.76 2768.43,9000.99 2768.43,7165.35 v3(2766.93,7165.35) ; v3(6862.41,7165.35) 6904.65,7207.59 v1(6904.65,9010.47) ; CN21.46@6925.98,9488.19 6970.02,9444.15 6970.02,9339.49 6970.02,9209.52 6951.84,9191.34 6951.84,9104.05 6955.5,9100.39 6955.5,7168.1 v3(6952.75,7165.35) ; v1(11099.14,9010.47) 11099.14,7207.59 v3(11056.9,7165.35) 11056.9,7161.3 11048.43,7152.82 11048.43,821.65 11102.36,767.72 11102.36,629.92 11113.16,619.13 11113.16,577.85 CN22.45@11121.59,569.42 ; CN24.46@11120.47,9488.19 11164.51,9444.15 11164.51,9339.49 11164.51,9209.52 11146.33,9191.34 11146.33,9104.05 11152.16,9098.22 11152.16,8937.01 11147.24,8932.09 v3(11147.24,7165.35) 11144.37,7162.48 11144.37,7140.44 11102.36,7098.43 11102.36,902.66 11200.6,804.43 11200.6,638.96 11173.23,611.59 11173.23,522.52 11121.59,470.88 CN22.46@11121.59,469.42 ; 15084.42,7135.4 15084.42,7138.66 15103.27,7157.5 v1(15103.27,7158.86) ; 15114.38,7105.44 15132.56,7087.26 15262.53,7087.26 15367.19,7087.26 CN25.46@15411.23,7131.3
  FlatSat VCC w30: v3(1643.7,7165.35) v3(1643.7,9163.39) ; v3(15000,7165.35) 15054.47,7165.35 15084.42,7135.4 15114.38,7105.44
  Bottom Layer w15: v1(2718.83,9010.47) 2718.83,9095.52 2712.6,9101.74 2712.6,9191.72 2687.99,9216.33 2687.99,9536.02 CN23.45@2740.16,9588.19 ; v1(6904.65,9010.47) 6904.65,9095.52 6898.42,9101.74 6898.42,9191.72 6873.81,9216.33 6873.81,9536.02 CN21.45@6925.98,9588.19 ; v1(11099.14,9010.47) 11099.14,9095.52 11092.91,9101.74 11092.91,9191.72 11068.3,9216.33 11068.3,9536.02 CN24.45@11120.47,9588.19
H1-47: CN21.47 CN21.48 CN22.47 CN22.48 CN23.47 CN23.48 CN24.47 CN24.48 CN25.47 CN25.48 R27.2 U4.7 | length 44663.3
  Top Layer w15: v1(15103.27,7250.14) 15136.59,7283.46 15459.06,7283.46 CN25.47@15511.23,7231.3
  Top Layer w30: R27.2@394.33,8690.94 394.33,8689.72 402.95,8681.1 492.13,8681.1 ; U4.7@414.57,8843.11 474.55,8843.11 492.13,8825.54 492.13,8681.1 ; v3(1722.44,7263.78) 1723.01,7263.21 v3(2578.55,7263.21) v3(2689.32,7263.21) v3(6764.38,7263.21) v3(6875.15,7263.21) v3(10958.87,7263.21) v3(11069.63,7263.21) 14983.67,7263.21 v3(15000,7246.88) ; v3(1722.44,8681.1) 492.13,8681.1
  FlatSat VCC w15: v3(2578.55,7263.21) 2617.92,7302.58 2617.92,9134.43 v1(2617.2,9135.16) ; CN23.48@2650.39,9488.19 2691.09,9447.49 2691.09,7297.38 2686.65,7292.94 2686.65,7271.14 2684.01,7268.51 v3(2689.32,7263.21) ; v3(6764.38,7263.21) 6803.75,7302.58 6803.75,9134.43 v1(6803.02,9135.16) ; CN21.48@6836.22,9488.19 6836.22,9477.96 6875.15,9439.03 v3(6875.15,7263.21) ; v1(10997.51,9135.16) 10998.24,9134.43 10998.24,7302.58 v3(10958.87,7263.21) 10937.01,7241.35 10937.01,771.65 11021.59,687.07 CN22.47@11021.59,569.42 ; CN22.48@11021.59,469.42 11070.95,518.78 11070.95,749.92 11012.1,808.77 11012.1,7167.17 11043.31,7198.39 11043.31,7236.5 11069.63,7262.81 v3(11069.63,7263.21) 11070.96,7264.53 11070.96,9447.94 CN24.48@11030.7,9488.19 ; 15080.97,7219.26 15080.97,7221.4 ; v1(15103.27,7250.14) 15103.27,7246.01 15080.97,7223.71 15080.97,7221.4 ; CN25.48@15411.23,7221.06 15367.19,7177.03 15262.53,7177.03 15125.34,7177.03 15080.97,7221.4
  FlatSat VCC w30: v3(1722.44,7263.78) v3(1722.44,8681.1) ; v3(15000,7246.88) 15053.35,7246.88 15080.97,7219.26
  Bottom Layer w15: v1(2617.2,9135.16) 2617.2,9187.12 2587.99,9216.33 2587.99,9536.02 CN23.47@2640.16,9588.19 ; v1(6803.02,9135.16) 6803.02,9187.12 6773.81,9216.33 6773.81,9536.02 CN21.47@6825.98,9588.19 ; v1(10997.51,9135.16) 10997.51,9187.12 10968.3,9216.33 10968.3,9536.02 CN24.47@11020.47,9588.19
H1-49: CN21.49 CN21.50 CN22.49 CN22.50 CN23.49 CN23.50 CN24.49 CN24.50 CN25.49 CN25.50 R26.2 U7.7 | length 43693.8
  Top Layer w15: v1(15103.27,7347.36) 15139.37,7383.46 15459.06,7383.46 CN25.49@15511.23,7331.3
  Top Layer w30: R26.2@394.33,8238.19 492.13,8238.19 ; U7.7@414.57,8390.35 474.55,8390.35 492.13,8372.78 492.13,8238.19 ; v3(1801.18,7352.36) 1806.15,7357.34 v3(2470.88,7357.34) v3(2565.19,7357.34) v3(6656.71,7357.34) 10865.21,7357.34 v3(10866.14,7358.27) 10867.07,7357.34 14988.62,7357.34 v3(15001.67,7344.28) ; v3(1801.18,8238.19) 492.13,8238.19
  FlatSat VCC w15: v3(2470.88,7357.34) 2510.25,7396.71 2510.25,9130.22 v1(2510.53,9130.5) ; CN23.50@2540.16,9488.19 2584.19,9444.15 2584.19,9339.49 2584.19,9222.56 2565.19,9203.57 v3(2565.19,7357.34) ; v3(6656.71,7357.34) 6696.08,7396.71 6696.08,9130.22 v1(6696.35,9130.5) ; CN21.50@6725.98,9488.19 6770.02,9444.15 6770.02,9339.49 6770.02,9222.56 6751.02,9203.57 v3(6751.02,7357.34) ; v3(10866.14,7358.27) 10866.14,7354.21 10852.94,7341 10852.94,749.43 10889.76,712.6 10889.76,625.98 10865.62,601.84 10865.62,525.38 CN22.50@10921.59,469.42 ; v3@10867.03,7359.15 10890.84,7382.97 v1(10890.84,9130.5) ; CN24.50@10920.47,9488.19 10964.51,9444.15 10964.51,9339.49 10964.51,9222.56 10945.51,9203.57 v3(10945.51,7357.34) 10942.65,7357.34 10901.57,7316.26 10901.57,755.91 10921.59,735.89 CN22.49@10921.59,569.42 ; 15086.34,7313.89 15090.12,7313.89 15116.75,7287.26 15262.53,7287.26 15367.19,7287.26 CN25.50@15411.23,7331.3 ; 15088.42,7332.52 v1(15103.27,7347.36)
  FlatSat VCC w30: v3(1801.18,7352.36) v3(1801.18,8238.19) ; v3(15001.67,7344.28) 15055.95,7344.28 15086.34,7313.89
  Bottom Layer w15: v1(2510.53,9130.5) 2510.53,9193.79 2487.99,9216.33 2487.99,9536.02 CN23.49@2540.16,9588.19 ; v1(6696.35,9130.5) 6696.35,9193.79 6673.81,9216.33 6673.81,9536.02 CN21.49@6725.98,9588.19 ; v1(10890.84,9130.5) 10890.84,9193.79 10868.3,9216.33 10868.3,9536.02 CN24.49@10920.47,9588.19
H1-51: CN21.51 CN21.52 CN22.51 CN22.52 CN23.51 CN23.52 CN24.51 CN24.52 CN25.51 CN25.52 R28.2 U9.7 | length 42700.3
  Top Layer w30: U9.7@424.41,7937.6 504.08,7937.6 521.65,7920.02 521.65,7805.12 ; R28.2@443.54,7805.12 521.65,7805.12 ; v3(1879.92,7460.63) 1882.24,7462.95 v3(2363.47,7462.95) v3(2462.2,7462.95) v3(6549.29,7462.95) 10737.84,7462.95 v3(10740.16,7460.63) 10742.47,7462.95 14978,7462.95 v3(15000,7440.94) ; v3(1879.92,7805.12) 521.65,7805.12
  FlatSat VCC w15: v3(2363.47,7462.95) 2402.95,7502.43 2402.95,9214.56 2391.14,9226.37 2391.14,9549.4 CN23.51@2429.92,9588.19 ; CN23.52@2440.16,9488.19 2484.19,9444.15 2484.19,9238.19 2457.4,9211.4 2457.4,8941.36 2462.2,8936.56 v3(2462.2,7462.95) ; v3(6549.29,7462.95) 6591.86,7505.51 6591.86,9182.62 6576.96,9197.51 6576.96,9549.4 CN21.51@6615.75,9588.19 ; CN21.52@6625.98,9488.19 6670.02,9444.15 6670.02,9238.19 6641.48,9209.65 6641.48,8939.34 6648.03,8932.79 v3(6648.03,7462.95) ; CN24.51@10810.24,9588.19 10771.45,9549.4 10771.45,9205.58 10785.78,9191.25 10785.78,7506.25 10737.29,7457.76 10740.98,7454.07 10740.98,7385.01 10795.28,7330.71 10795.28,704.72 10763.78,673.23 10763.78,535.43 10821.59,477.63 CN22.52@10821.59,469.42 ; CN24.52@10820.47,9488.19 10864.51,9444.15 10864.51,9238.19 10838.27,9211.95 10838.27,8941.7 10842.52,8937.45 v3(10842.52,7462.95) 10804.65,7425.08 10804.65,7362.15 10821.59,7345.22 10821.59,654.02 10823.72,651.88 10823.72,631.58 10821.59,629.45 CN22.51@10821.59,569.42 ; 15077.41,7437.18 15120.55,7480.31 15472.44,7480.31 15511.23,7441.53 CN25.51@15511.23,7431.3 ; 15081.68,7418.55 15083.44,7418.55 15114.73,7387.26 15367.19,7387.26 CN25.52@15411.23,7431.3
  FlatSat VCC w30: v3(1879.92,7460.63) v3(1879.92,7805.12) ; v3(15000,7440.94) 15059.28,7440.94 15081.68,7418.55
H1_N: CN20.1 CN21.1 CN22.1 CN24.1 CN25.1 S3.2 | length 34772.1
  Top Layer w8: CN20.1@251.18,4929.13 225.65,4954.66 225.65,4960.45 220.97,4965.13 118.11,4965.13 78.74,4925.76 78.74,4763.78 157.48,4685.04 255.91,4586.61 688.98,4586.61 866.14,4763.78 1929.13,4763.78 1996.5,4831.15 2860.32,4831.15 2863.07,4831.15 2881.07,4831.15 2881.07,4826.15 2899.07,4826.15 2899.07,4831.15 2899.07,4873.59 2917.07,4873.59 2917.07,4831.15 2917.07,4826.15 2935.07,4826.15 2935.07,4831.15 2935.07,4873.59 2953.07,4873.59 2953.07,4831.15 2953.07,4826.15 2971.07,4826.15 2971.07,4831.15 2971.07,4873.59 2989.07,4873.59 2989.07,4831.15 2989.07,4826.15 3007.07,4826.15 3007.07,4831.15 3007.07,4873.59 3025.07,4873.59 3025.07,4831.15 3025.07,4826.15 3043.07,4826.15 3043.07,4831.15 3052.07,4831.15 v1(5636.5,4831.15) v1(9606.3,4831.15) 11584.66,4831.15 13505.06,4831.15 13506.26,4832.35 13513.45,4832.35 v1(13515.75,4834.65) 13517.5,4832.9 14010.75,4832.9 14012.5,4831.15 v1(14015.75,4831.15) 14814.75,4831.15 15059.17,4586.73 15413.5,4586.73 15645.09,4818.32 15666.09,4839.32 15666.09,4924.46 15629.92,4960.63 15623.26,4967.3 15541.44,4967.3 15536.76,4962.61 15536.76,4956.82 CN25.1@15511.23,4931.3 ; CN21.1@9125.98,9588.19 9125.98,9640.98 9130.67,9645.67 9330.71,9645.67 9609.8,9366.58 v1(9609.8,7622.05) ; CN22.1@13296.06,594.95 CN22.1@13321.59,569.42 ; CN24.1@13320.47,9588.19 13294.94,9613.72 13289.16,9613.72 13284.47,9618.4 13284.47,9626.81 13303.33,9645.67 13543.31,9645.67 13661.42,9527.56 14015.75,9173.23 v1(14015.75,7559.06)
  Bottom Layer w8: S3.2@5630.71,7647.64 5604.55,7621.48 5604.55,4863.1 v1(5636.5,4831.15) v1@5639.75,4831.15 ; v1(9606.3,4831.15) 9608.05,4832.9 9608.05,7620.3 v1(9609.8,7622.05) ; CN22.1@13321.59,569.42 13318.96,572.04 13318.96,4544.5 13532.82,4758.36 13532.82,4802.74 13515.89,4819.67 13515.89,4834.51 v1(13515.75,4834.65) ; v1(14015.75,4831.15) v1(14015.75,7559.06)
H1_P: CN20.3 CN21.3 CN22.3 CN24.3 CN25.3 S3.1 | length 34906.6
  Top Layer w8: CN20.3@251.18,5029.13 241.41,5019.36 241.41,4999.47 235.08,4993.13 106.51,4993.13 50.74,4937.36 50.74,4752.18 147.58,4655.34 245.84,4557.09 699.05,4557.09 877.74,4735.78 1940.73,4735.78 2008.1,4803.15 v1(5624.9,4803.15) 13481,4803.15 13484.94,4807.09 v1(13488.19,4807.09) 13490.16,4805.12 14041.78,4805.12 v1(14043.75,4803.15) 14803.15,4803.15 15047.57,4558.73 15425.1,4558.73 15673.09,4806.72 15694.09,4827.72 15694.09,4936.06 15634.85,4995.3 15527.33,4995.3 15521,5001.63 15521,5021.53 CN25.3@15511.23,5031.3 ; CN21.3@9025.98,9588.19 9111.46,9673.67 9342.31,9673.67 9637.8,9378.18 v1(9637.8,7622.05) ; CN24.3@13220.47,9588.19 13230.24,9597.96 13250.14,9597.96 13256.47,9604.29 13256.47,9638.41 13291.73,9673.67 13554.91,9673.67 13701.02,9527.56 14043.75,9184.83 v1(14043.75,7559.06) ; CN22.3@13221.59,569.42 CN22.3@13221.59,582.71
  Bottom Layer w7.99: CN22.3@13221.59,569.42 13221.59,583.24 13235.76,597.41 13235.76,597.97 13297.24,659.45
  Bottom Layer w8: S3.1@5530.71,7647.64 5576.55,7601.8 5576.55,4851.5 v1(5624.9,4803.15) v1@5626.61,4801.44 ; v1(9634.3,4803.15) 9636.05,4804.9 9636.05,7620.3 v1(9637.8,7622.05) ; 13297.24,659.45 13297.24,4548.24 13514.82,4765.82 13514.82,4795.29 13503.16,4806.95 13488.33,4806.95 v1(13488.19,4807.09) ; v1(14043.75,4803.15) v1(14043.75,7559.06)
H2-25: CN21.77 CN21.78 CN22.77 CN22.78 CN23.77 CN23.78 CN24.77 CN24.78 CN25.77 CN25.78 R30.2 U13.7 | length 47561.1
  Top Layer w15: v1(12107.87,708.66) 12068.5,669.29 12068.5,314.96 CN22.78@12114.05,269.42
  Top Layer w30: U13.7@1138.48,8051.18 1194.86,8051.18 1235.73,8010.31 1235.73,7902.04 ; R30.2@1176.08,7901.13 v3@1357.35,7901.13 ; v3@1357.35,7902.63 v3(1358.27,7903.54) ; v3(1362.16,6106.26) v3(3723.71,6106.26) v3(7909.53,6106.26) v3(12104.02,6106.26) 14978,6106.26 v3(15000,6128.26)
  FlatSat VCC w15: v3(1358.27,7903.54) v3@1360.22,7901.59 ; v3@1360.22,6108.21 v3(1362.16,6106.26) ; v3@3722.21,6106.26 v3@3722.96,6107.01 ; v3(3723.71,6106.26) v3@3722.96,6107.01 ; CN23.77@3735.38,9388.19 3685.38,9338.19 3685.38,9233.3 3703.72,9214.97 3703.72,9150.63 3722.21,9132.14 3722.21,6107.76 v3@3722.96,6107.01 ; CN23.78@3740.16,9288.19 3740.16,9166.69 3758.3,9148.55 3758.3,6142.35 v3@3722.96,6107.01 ; v3(7909.53,6106.26) v3@7911.38,6108.11 ; CN21.77@7921.21,9388.19 7871.21,9338.19 7871.21,9233.3 7889.54,9214.97 7889.54,9155.36 7911.38,9133.52 v3@7911.38,6108.11 ; CN21.78@7925.98,9288.19 7925.98,9155.12 7942.23,9138.88 7942.23,6138.95 v3@7911.38,6108.11 ; v1(12107.87,708.66) 12107.87,710.01 12086.61,731.27 12086.61,6066.41 12104.02,6083.82 v3(12104.02,6106.26) ; CN24.77@12115.7,9388.19 12065.7,9338.19 12065.7,9233.3 12084.03,9214.97 12084.03,9155.36 12117.56,9121.83 12117.56,9091.82 12106.22,9080.48 v3@12106.22,6108.46 ; CN24.78@12120.47,9288.19 12120.47,9155.12 12136.71,9138.88 12136.71,6138.95 v3@12106.22,6108.46 ; CN22.77@12121.59,369.42 12068.5,422.5 12068.5,6070.74 v3(12104.02,6106.26) ; 15088.51,6128.26 CN25.78@15208.19,6128.26 ; 15105.17,6144.91 15146.06,6185.81 15256.71,6185.81 CN25.77@15311.23,6131.3 ; v3(12104.02,6106.26) v3@12106.22,6108.46
  FlatSat VCC w30: v3@1360.22,6108.21 v3@1360.22,7901.59 ; v3(15000,6128.26) 15088.51,6128.26 15105.17,6144.91
H2-27: CN21.79 CN21.80 CN22.79 CN22.80 CN23.79 CN23.80 CN24.79 CN24.80 CN25.79 CN25.80 R31.2 U18.7 | length 47450.4
  Top Layer w15: v1(11929.13,708.66) 11929.13,703.69 11968.5,664.32 11968.5,314.96 12014.05,269.42 CN22.80@12021.59,269.42
  Top Layer w30: U18.7@1142.91,8481.3 1222.58,8481.3 1240.16,8463.73 1240.16,8338.98 ; R31.2@1171.89,8338.98 1240.16,8338.98 ; v3(1466.54,6230.31) 1467.26,6231.04 v3(3519.99,6231.04) v3(3600.79,6231.04) v3(7705.82,6231.04) v3(7786.61,6231.04) v3(11900.3,6231.04) v3(11981.1,6231.04) 14997.22,6231.04 v3(15000,6228.26) ; v3@1466.54,8338.98 1240.16,8338.98
  FlatSat VCC w15: v3(3519.99,6231.04) 3598.73,6309.78 3598.73,9219.96 3585.38,9233.3 3585.38,9338.19 3635.38,9388.19 CN23.79@3640.16,9388.19 ; v3(3600.79,6231.04) 3640.16,6270.41 CN23.80@3640.16,9288.19 ; v3(7705.82,6231.04) 7784.56,6309.78 7784.56,9219.96 7771.21,9233.3 7771.21,9338.19 7821.21,9388.19 CN21.79@7825.98,9388.19 ; v3(7786.61,6231.04) 7838.11,6282.53 7838.11,9142.99 7825.98,9155.12 CN21.80@7825.98,9288.19 ; v1(11929.13,708.66) 11900.3,737.49 v3(11900.3,6231.04) 11979.04,6309.78 11979.04,9219.96 11965.7,9233.3 11965.7,9338.19 12015.7,9388.19 CN24.79@12020.47,9388.19 ; CN24.80@12020.47,9288.19 12020.47,9155.12 12032.6,9142.99 12032.6,6282.53 v3(11981.1,6231.04) 11981.1,681.89 11968.5,669.29 11968.5,422.5 CN22.79@12021.59,369.42 ; 15088.51,6228.26 CN25.80@15208.19,6228.26 ; 15105.17,6244.91 15146.06,6285.81 15256.71,6285.81 CN25.79@15311.23,6231.3
  FlatSat VCC w30: v3(1466.54,6230.31) v3(1466.54,8336.61) ; v3(15000,6228.26) 15088.51,6228.26 15105.17,6244.91
H2-35: CN21.87 CN21.88 CN22.87 CN22.88 CN23.87 CN23.88 CN24.87 CN24.88 CN25.87 CN25.88 R29.2 U12.7 | length 46038.1
  Top Layer w30: U12.7@1142.91,8951.38 1196.26,8951.38 1240.16,8907.48 1240.16,8893.9 1240.16,8818.9 ; R29.2@1162.05,8818.9 1240.16,8818.9 ; v3(1555.12,6633.86) 1560.14,6638.88 v3(3175.28,6638.88) v3(7361.1,6638.88) v3(11555.59,6638.88) 14989.38,6638.88 v3(15000,6628.26) ; v3(1555.12,8818.9) 1240.16,8818.9
  FlatSat VCC w15: CN23.88@3240.16,9288.19 3240.16,6665.35 3213.68,6638.88 v3(3175.28,6638.88) 3214.65,6678.25 3214.65,9165.9 3188.98,9191.57 3188.98,9330.71 3240.16,9381.89 CN23.87@3240.16,9388.19 ; CN21.88@7425.98,9288.19 7425.98,6665.35 7399.51,6638.88 v3(7361.1,6638.88) 7400.47,6678.25 7400.47,9165.9 7374.8,9191.57 7374.8,9330.71 7425.98,9381.89 CN21.87@7425.98,9388.19 ; CN24.88@11620.47,9288.19 11620.47,6665.35 11594,6638.88 v3(11555.59,6638.88) ; CN24.87@11620.47,9388.19 11620.47,9381.89 11569.29,9330.71 11569.29,9191.57 11594.96,9165.9 11594.96,6678.25 v3(11555.59,6638.88) ; CN22.88@11621.59,269.42 11671.64,319.47 11671.64,608.65 11732.28,669.29 11732.28,6299.21 11614.17,6417.32 11567.35,6464.14 11567.35,6551.08 11557.44,6561 11557.44,6637.03 v3(11555.59,6638.88) ; CN22.87@11621.59,369.42 11574.8,416.2 11574.8,629.92 11614.17,669.29 11614.17,6299.21 11535.43,6377.95 11535.43,6614.66 11555.59,6634.82 v3(11555.59,6638.88) ; 15088.51,6628.26 15208.19,6628.26 CN25.88@15211.23,6631.3 ; 15105.17,6644.91 15146.06,6685.81 15256.71,6685.81 CN25.87@15311.23,6631.3
  FlatSat VCC w30: v3(1555.12,6633.86) v3(1555.12,8818.9) ; v3(15000,6628.26) 15088.51,6628.26 15105.17,6644.91
H2-41: CN20.93 CN21.93 CN22.93 CN23.93 CN24.93 CN25.93 | length 28993.3
  Top Layer w8: v1(676.67,6951.28) v1(2878.64,6951.28) v1(7064.47,6951.28) v1(11258.96,6951.28) 15083.58,6951.28 v1(15085.74,6953.44) ; v1(2918.01,9162.7) 2918.01,9251.87 2898.82,9271.07 2898.82,9346.85 CN23.93@2940.16,9388.19 ; v1(7103.84,9162.7) 7103.84,9251.87 7084.65,9271.07 7084.65,9346.85 CN21.93@7125.98,9388.19 ; v1(11298.33,9162.7) 11298.33,9251.87 11279.13,9271.07 11279.13,9346.85 CN24.93@11320.47,9388.19
  Bottom Layer w8: CN20.93@451.18,6929.13 492.52,6970.47 568.3,6970.47 587.5,6951.28 v1(676.67,6951.28) ; v1(2878.64,6951.28) 2918.01,6990.65 v1(2918.01,9162.7) ; v1(7064.47,6951.28) 7103.84,6990.65 v1(7103.84,9162.7) ; v1(11298.33,9162.7) 11298.33,6990.65 v1(11258.96,6951.28) 11222.56,6914.87 11222.56,1417.32 11222.56,694.71 11210.5,682.65 11210.5,649.9 11262.12,598.28 11262.12,471.56 11321.59,412.09 CN22.93@11321.59,369.42 ; v1(15085.74,6953.44) 15104.13,6971.83 15270.69,6971.83 CN25.93@15311.23,6931.3
H2-43: CN20.95 CN21.95 CN22.95 CN23.95 CN24.95 CN25.95 | length 28738.5
  Top Layer w8: v1(676.84,7077.84) v1(2752.09,7077.84) v1(6937.91,7077.84) v1(11132.4,7077.84) 15083.41,7077.84 v1(15085.57,7080) ; v1(2792.94,9162.53) 2792.94,9340.97 CN23.95@2840.16,9388.19 ; v1(6977.28,9162.53) 6977.28,9339.49 CN21.95@7025.98,9388.19 ; v1(11171.77,9162.53) 11171.77,9339.49 CN24.95@11220.47,9388.19
  Bottom Layer w8: CN20.95@451.18,7029.13 499.88,7077.84 v1(676.84,7077.84) ; v1(2752.09,7077.84) 2792.94,7118.69 v1(2792.94,9162.53) ; v1(6937.91,7077.84) 6978.86,7118.78 6978.86,9160.96 v1(6977.28,9162.53) ; v1(11171.77,9162.53) 11174.07,9160.24 11174.07,9153.5 11175.72,9151.85 11175.72,7121.16 v1(11132.4,7077.84) 11096,7041.43 11096,1417.32 11096,882.35 11128.59,849.76 11128.59,748.08 11108.55,728.04 11108.55,651.86 11162.12,598.28 11162.12,471.56 11221.59,412.09 CN22.95@11221.59,369.42 ; v1(15085.57,7080) 15262.53,7080 CN25.95@15311.23,7031.3
H2-45: CN20.97 CN21.97 CN22.97 CN23.97 CN24.97 CN25.97 | length 28530.4
  Top Layer w8: v1@15084.49,7178.92 v1(15085.57,7180)
  Top Layer w15: CN20.97@451.18,7129.13 500.96,7178.92 604.11,7178.92 629.9,7204.7 2126.53,7204.7 2128.87,7202.36 v1(6811.09,7202.36) v1(11005.58,7202.36) 15061.98,7202.36 15084.49,7179.85 v1@15084.49,7178.92 ; v1(2664.51,9012.65) 2664.57,9012.7 2664.57,9209.45 2690.37,9235.26 2690.37,9338.41 CN23.97@2740.16,9388.19 ; v1(6850.34,9012.65) 6850.39,9012.7 6850.39,9209.45 6876.2,9235.26 6876.2,9338.41 CN21.97@6925.98,9388.19 ; v1(10974.41,787.4) 11077.55,684.26 11077.55,418.51 11121.59,374.48 CN22.97@11121.59,369.42 ; v1(11044.83,9012.65) 11044.88,9012.7 11044.88,9209.45 11070.69,9235.26 11070.69,9338.41 CN24.97@11120.47,9388.19
  FlatSat VCC w15: v1(2625.27,7202.36) 2659.81,7236.91 2659.81,7280.53 2664.64,7285.35 2664.64,9012.52 v1(2664.51,9012.65) ; v1(6811.09,7202.36) 6845.64,7236.91 6845.64,8121.75 6850.34,8126.45 v1(6850.34,9012.65) ; v1(10974.41,787.4) 10974.41,7171.19 v1(11005.58,7202.36) 11005.58,7254.39 11026.6,7275.41 11026.6,8918.78 11044.83,8937.01 v1(11044.83,9012.65)
  Bottom Layer w8: v1(15085.57,7180) 15262.53,7180 CN25.97@15311.23,7131.3
H2-46: CN20.98 CN21.98 CN22.98 CN23.98 CN24.98 CN25.98 | length 28097.5
  Top Layer w15: CN20.98@551.18,7129.13 554.33,7125.98 v1(2698.05,7125.98) v1(6883.88,7125.98) v1(11078.36,7125.98) 15205.92,7125.98 CN25.98@15211.23,7131.3 ; CN23.98@2740.16,9288.19 2743.44,9284.91 v1(2743.44,9042.61) ; CN21.98@6925.98,9288.19 6929.27,9284.91 v1(6929.27,9042.61) ; CN24.98@11120.47,9288.19 11123.76,9284.91 v1(11123.76,9042.61)
  FlatSat VCC w15: v1(2698.05,7125.98) 2737.42,7165.35 2737.42,7195.06 2743.44,7201.09 v1(2743.44,9042.61) ; v1(6883.88,7125.98) 6923.25,7165.35 6923.25,7195.06 6929.27,7201.09 v1(6929.27,9042.61) ; v1(11092.52,836.61) 11078.36,850.77 v1(11078.36,7125.98) 11102.07,7149.69 11102.07,7172.94 11123.76,7194.62 v1(11123.76,9042.61)
  Bottom Layer w15: v1(11092.52,836.61) 11092.52,777.56 11077.55,762.59 11077.55,313.45 CN22.98@11121.59,269.42
H2_N: CN20.54 CN21.54 CN22.54 CN24.54 CN25.54 S6.2 | length 32064.9
  Top Layer w8: v1(787.4,4921.26) 1020.64,4921.26 1023.62,4918.28 1032.62,4918.28 1032.62,4923.28 1050.62,4923.28 1050.62,4918.28 1050.62,4903.6 1068.62,4903.6 1068.62,4918.28 1068.62,4923.28 1086.62,4923.28 1086.62,4918.28 1086.62,4903.6 1104.62,4903.6 1104.62,4918.28 1104.62,4923.28 1122.62,4923.28 1122.62,4918.28 1122.62,4903.6 1140.62,4903.6 1140.62,4918.28 1140.62,4923.28 1158.62,4923.28 1158.62,4918.28 1158.62,4903.6 1176.62,4903.6 1176.62,4918.28 1181.1,4918.28 4937.97,4918.28 4949.06,4929.37 v1(5348.63,4929.37) v1(9398.08,4929.37) 9398.94,4930.24 13754.78,4930.24 v1(13756.41,4931.87) ; CN21.54@9125.98,9288.19 9125.98,9145.67 9028.33,9048.01 9028.33,8960.26 9031.78,8956.81 9401.57,8587.02 v1(9401.57,7622.05) ; CN24.54@13320.47,9288.19 13327.49,9281.17 13327.49,9154.26 13222.82,9049.59 13222.82,8961.49 13768.16,8416.15 v1(13768.16,7559.06) ; v1@13756.93,4931.38 13758.93,4929.37 v1(14841.88,4929.37)
  Bottom Layer w7.99: CN22.54@13321.59,269.42 13320.57,268.4 13320.57,212.9 13444.57,88.9 13595.53,88.9 13631.89,125.26
  Bottom Layer w8: CN20.54@551.18,4929.13 559.06,4921.26 v1(787.4,4921.26) ; S6.2@5289.59,7641.95 5289.59,4988.41 v1(5348.63,4929.37) ; v1(9398.08,4929.37) 9399.83,4931.12 9399.83,7620.3 v1(9401.57,7622.05) ; 13631.89,125.26 13700.79,194.15 13700.79,4869.33 13754.12,4922.66 13754.12,4929.57 13774.16,4949.61 13774.16,6253.94 13763.16,6264.94 13763.16,7550.81 13768.16,7555.81 v1(13768.16,7559.06) ; v1(14841.88,4929.37) 14842.38,4928.87 15208.8,4928.87 CN25.54@15211.23,4931.3
  Bottom Layer w15: S6.2@5289.59,7641.95 S6.2@5295.28,7647.64